# Altium PCB motor4-PCB.PcbDoc (part 1 of 2)
Units mil, origin at the board's own origin, x right, y up, seen from the top; angles counter-clockwise.
Board outline 5665.03 x 3265.03 mil, 2 copper layers (Top Layer, Bottom Layer); 182 components, 188 nets, 677 pads, 124 vias.
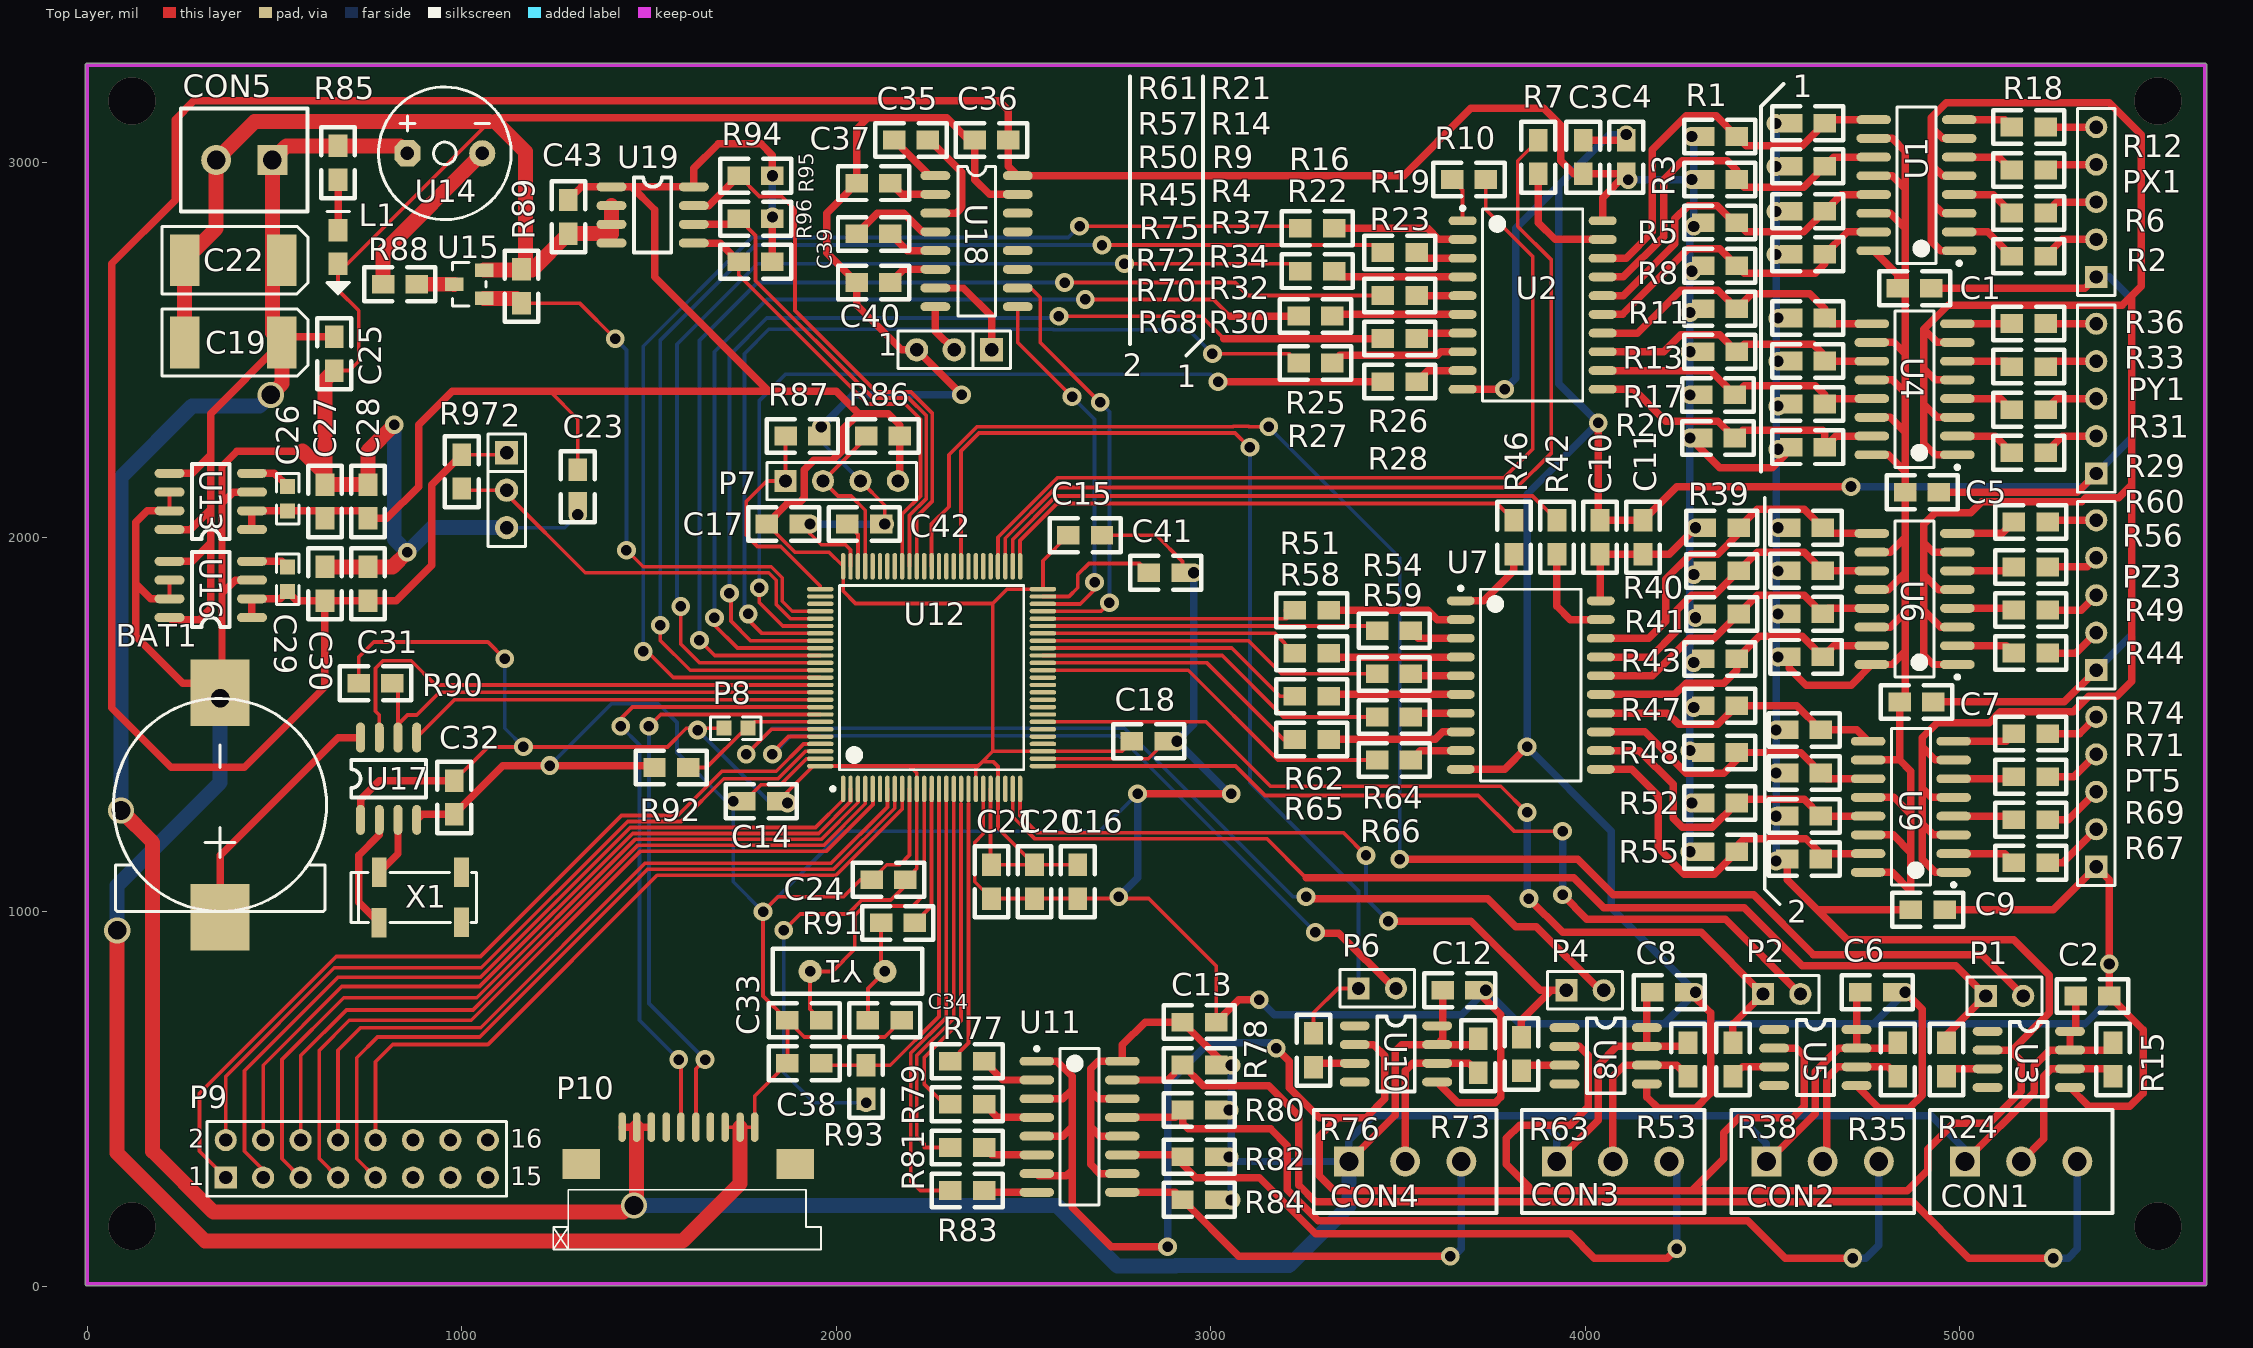
[diagram p0: Top Layer view]
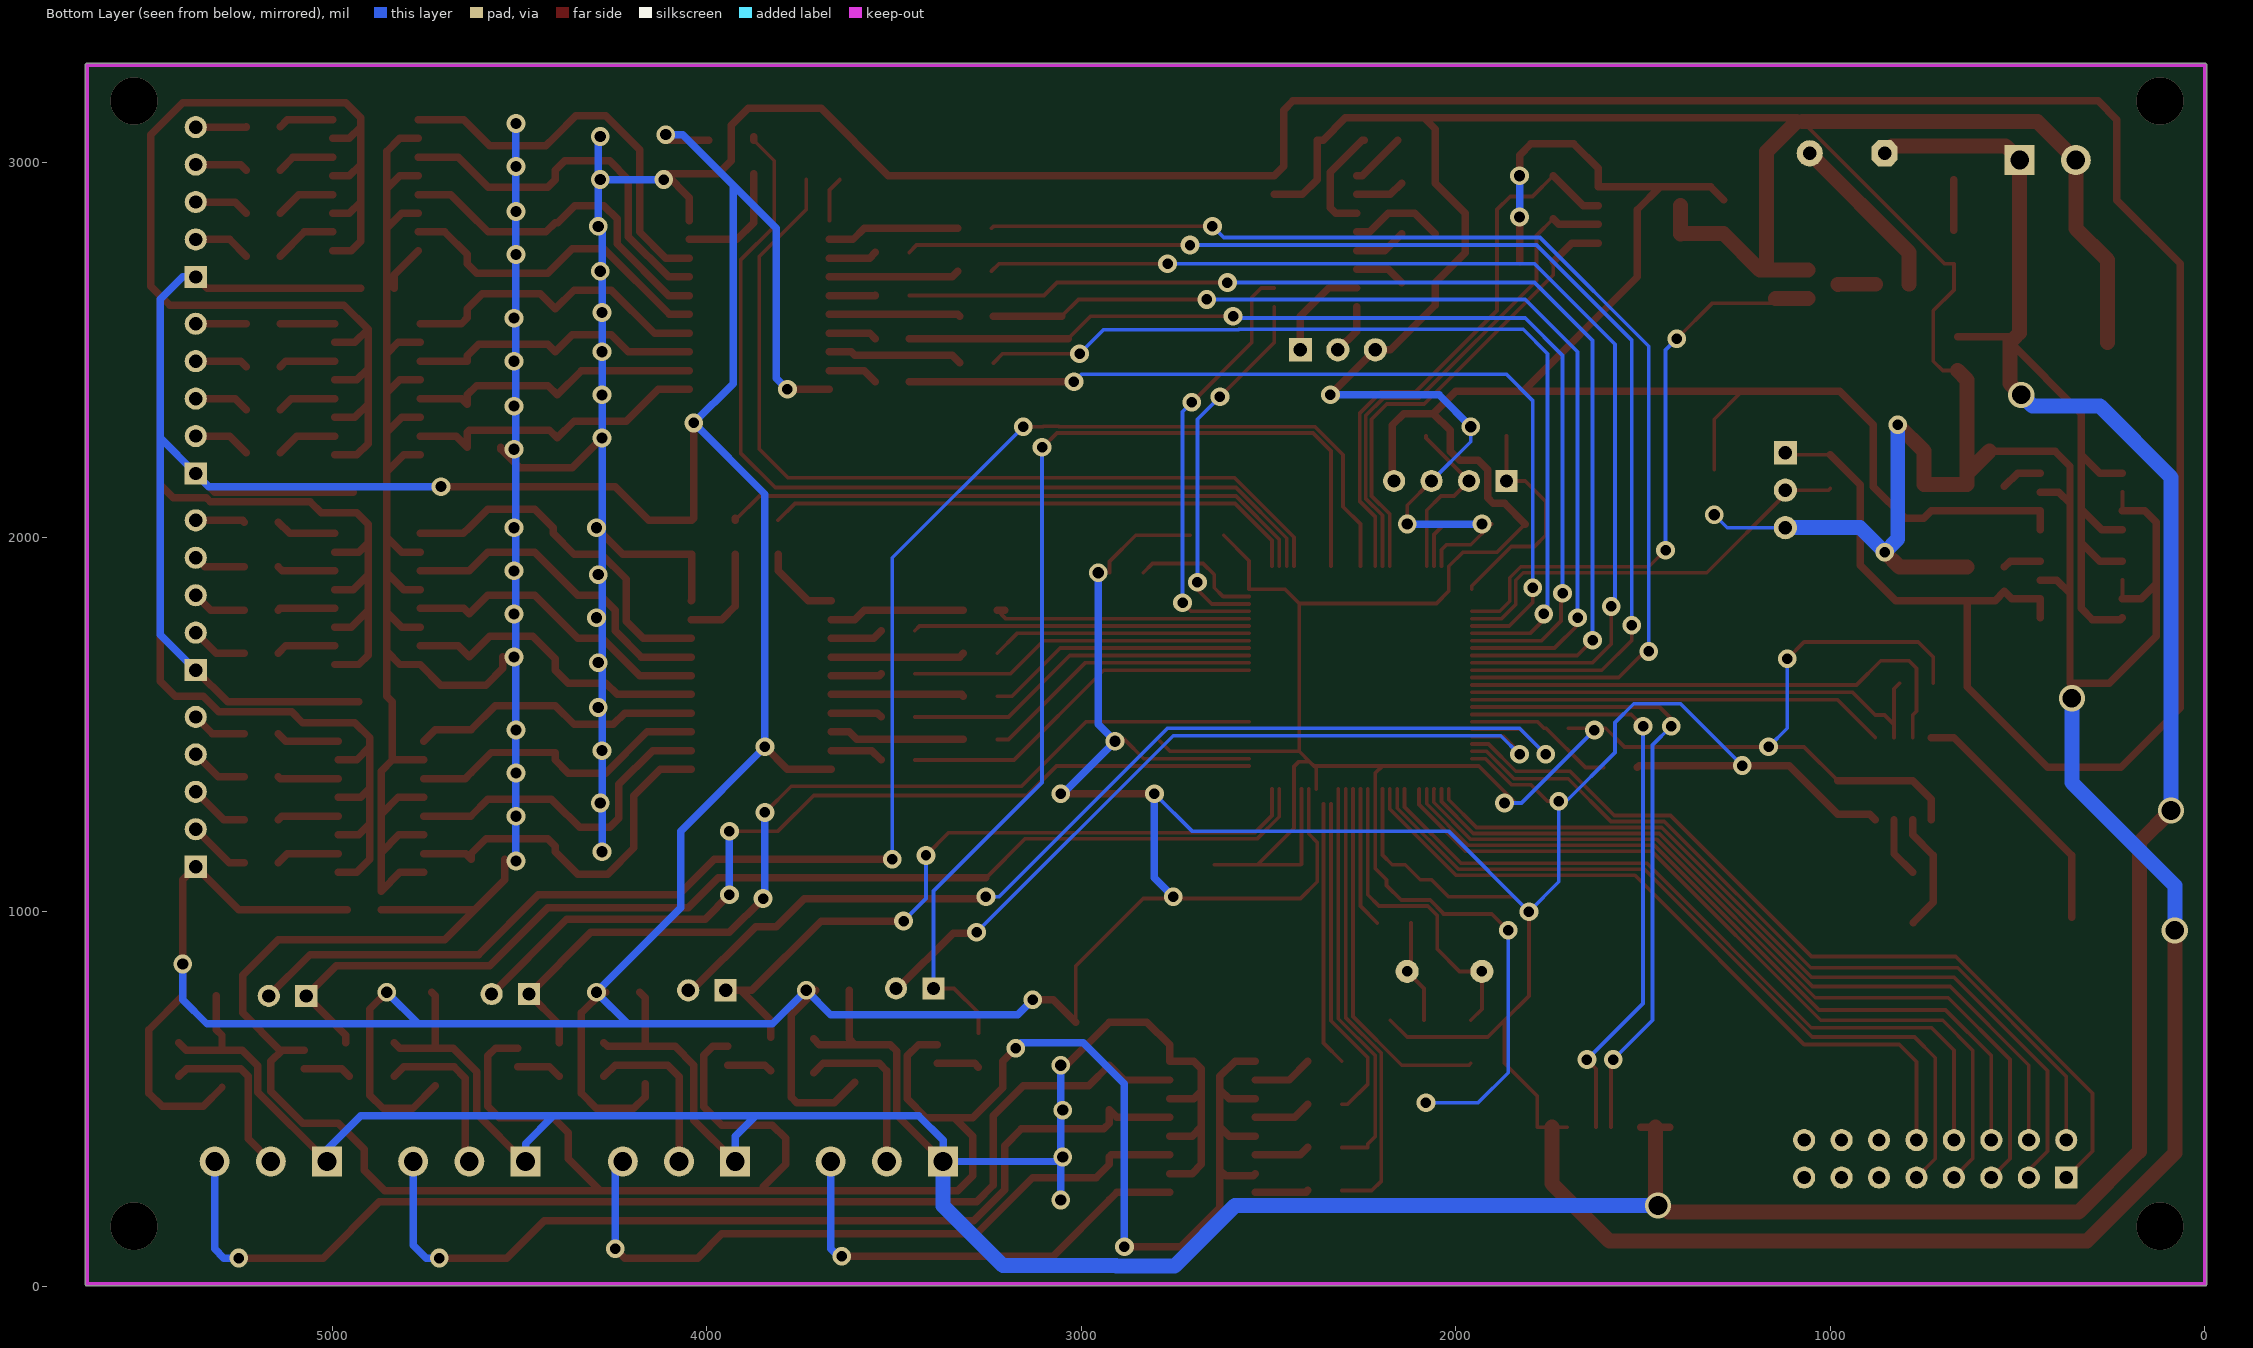
[diagram p1: Bottom Layer view, seen from below]

## Layer stack, top to bottom
Top Solder: solder mask 0.4, Solder Resist, Dk 3.5
Top Layer: signal copper 1.4
Dielectric 1: dielectric 12.6, FR-4, Dk 4.8
Bottom Layer: signal copper 1.4
Bottom Solder: solder mask 0.4, Solder Resist, Dk 3.5

## Board outline
0,0.41 cw(c0,5.43) -5.01,5.43 -5.01,3260.43 cw(c0,3260.43) 0,3265.44 5655,3265.44 cw(c5655,3260.43) 5660.02,3260.43 5660.02,5.43 cw(c5655,5.43) 5655,0.41

## Design rules (kind name [scope] priority, off if disabled: settings)
Clearance [All] p1: gap=6
PolygonConnect [All] p1: connectstyle=Relief reliefconductorwidth=10 reliefentries=4 polygonreliefangle="90 Angle" airgapwidth=10
RoutingVias [All] p1: holewidth=28 width=50 viastyle="Through Hole" minholewidth=28 minwidth=50 maxholewidth=28 maxwidth=50
SilkToSilkClearance [All] p1: silktosilkclearance=0
SilkToSolderMaskClearance [IsPad] p1: minsilkscreentomaskgap=0 clearancetoexposedcopper=TRUE
SolderMaskExpansion [All] p1: expansion=4
Width [All] p1: maxlimit=50 minlimit=10 preferedwidth=10 minimp=50.000000 maximp=50.000000 favimp=50.000000
27 further rules are at their usual default settings.

## Classes and differential pairs
component class stm32-motor4: 1 2 BAT1 C14 C15 C16 C17 C18 C19 C20 C21 C22 C23 C24 C25 C26 C27 C28 C29 C30 C31 C32 C33 C34 C35 C36 C37 C38 C39 C40 C41 C42 C43 CON5 L1 P7 P8 P9 P10 R85 R86 R87 R88 R89 R90 R91 R92 R93 R94 R95 R96 R97 U12 U13 U14 U15 U16 U17 U18 U19 X1 Y1
component class motor-drive: C1 C2 C3 C4 C5 C6 C7 C8 C9 C10 C11 C12 C13 CON1 CON2 CON3 CON4 P1 P2 P4 P6 PT5 PX1 PY1 PZ3 R1 R2 R3 R4 R5 R6 R7 R8 R9 R10 R11 R12 R13 R14 R15 R16 R17 R18 R19 R20 R21 R22 R23 R24 R25 R26 R27 R28 R29 R30 R31 R32 R33 R34 R35 R36 R37 R38 R39 R40 R41 R42 R43 R44 R45 R46 R47 R48 R49 R50 R51 R52 R53 R54 R55 R56 R57 R58 R59 R60 R61 R62 R63 R64 R65 R66 R67 R68 R69 R70 R71 R72 R73 R74 R75 R76 R77 R78 R79 R80 R81 R82 R83 R84 U1 U2 U3 U4 U5 U6 U7 U8 U9 U10 U11

## Components (designator, comment, footprint, x,y, rotation, side; value= is the part's Value field where it differs from the comment)
1 "CON3" SIP3 2415,2500.43 r180 top
2 "CON3" SIP3 1120,2225.43 r270 top
BAT1 "BAT3.6V" BAT 355,985 r90 top
C1 "0.1uF" 0805 4835,2665 r0 top
C2 "0.1uF" 0805 5400,775 r180 top
C3 "10uF" 0805 3995,2970 r90 top
C4 "0.1uF" 0805 4110,3060 r270 top
C5 "0.1uF" 0805 4855,2120 r0 top
C6 "0.1uF" 0805 4825,785 r180 top
C7 "0.1uF" 0805 4840,1560 r0 top
C8 "0.1uF" 0805 4270,785 r180 top
C9 "0.1uF" 0805 4870,1005 r0 top
C10 "10uF" 0805 4040,1955 r90 top
C11 "0.1uF" 0805 4155,2045 r270 top
C12 "0.1uF" 0805 3710,790 r180 top
C13 "0.1uF" 0805 2925,705 r0 top
C14 "0.1uF" 0805 1845,1295 r180 top
C15 "0.1uF" 0805 2710,2005 r180 top
C16 "0.1uF" 0805 2645,1035 r90 top
C17 "0.1uF" 0805 1905,2035 r180 top
C18 "0.1uF" 0805 2880,1455 r180 top
C19 "100uF" 100UF/25V_CA 520,2520 r180 top
C20 "0.1uF" 0805 2530,1035 r90 top
C21 "0.1uF" 0805 2415,1035 r90 top
C22 "100uF" 100UF/25V_CA 520,2740 r180 top
C23 "0.1uF" 0805 1310,2090 r90 top
C24 "0.1uF" 0805 2095,1085 r0 top
C25 "0.1uF" 0805 660,2535 r270 top
C26 "103" 0603 535,2070.43 r90 top
C27 "10uF" 0805 635,2050.43 r90 top
C28 "104" 0805 750,2050.43 r90 top
C29 "103" 0603 535,1855.43 r90 top
C30 "10uF" 0805 635,1830.43 r90 top
C31 "104" 0805 750,1830.43 r90 top
C32 "104" 0805 980,1260 r90 top
C33 "8pF" 0805 1960,710 r180 top
C34 "8pF" 0805 2085,710 r0 top
C35 "104" 0805 2245,3060.43 r180 top
C36 "104" 0805 2460,3060.43 r180 top
C37 "104" 0805 2055,2945.43 r0 top
C38 "100nF" 0805 1960,595 r180 top
C39 "104" 0805 2145,2810 r180 top
C40 "104" 0805 2055,2680 r0 top
C41 "2.2uF" 0805 2835,1905 r0 top
C42 "2.2uF" 0805 2030,2035 r0 top
C43 "104" 0805 1285,2900.43 r270 top
CON1 "Header 3" CON3 5150,400 r0 top
CON2 "Header 3" CON3 4620,400 r0 top
CON3 "Header 3" CON3 4060,400 r0 top
CON4 "Header 3" CON3 3505,400 r0 top
CON5 "5VIN" CON2 405,2955 r180 top
L1 "LED" 0805LED 670,2820 r270 top
P1 "Header 2" HDR1X2 5070,775 r0 top
P2 "Header 2" HDR1X2 4475,780 r0 top
P4 "Header 2" HDR1X2 3950,790 r0 top
P6 "Header 2" HDR1X2 3395,795 r0 top
P7 "JTAG" HDR1X4 1865,2150 r0 top
P8 "boot" 0603 1765,1490 r180 top
P9 "Header 8X2" HDR2X8 370,290 r0 top
P10 "ping" PCBComponent_1 1605,375 r0 top
PT5 "Header 5" HDR1X5 5365,1120 r90 top
PX1 "Header 5" HDR1X5 5365,2695 r90 top
PY1 "Header 5" HDR1X5 5365,2170 r90 top
PZ3 "Header 5" HDR1X5 5365,1645 r90 top
R1 "1K" 0805 4405,3070 r180 top
R2 "1K" 0805 5140,2750.43 r0 top
R3 "1K" 0805 4405,2955 r180 top
R4 "1K" 0805 4550,2755.43 r0 top
R5 "1K" 0805 4405,2840 r180 top
R6 "1K" 0805 5140,2865.43 r0 top
R7 "1K" 0805 3875,3060 r270 top
R8 "1K" 0805 4405,2725 r180 top
R9 "1K" 0805 4550,2870.43 r0 top
R10 "1K" 0805 3735,2955 r180 top
R11 "1K" 0805 4405,2610 r180 top
R12 "1K" 0805 5140,2980.43 r0 top
R13 "1K" 0805 4405,2495 r180 top
R14 "1K" 0805 4550,2990.43 r0 top
R15 "1K" 0805 5410,560 r90 top
R16 "1K" 0805 3240,2825 r0 top
R17 "1K" 0805 4400,2380 r180 top
R18 "1K" 0805 5140,3095.43 r0 top
R19 "1K" 0805 3460,2760.43 r0 top
R20 "1K" 0805 4400,2265 r180 top
R21 "1K" 0805 4550,3105.43 r0 top
R22 "1K" 0805 3240,2710.43 r0 top
R23 "1K" 0805 3460,2645.43 r0 top
R24 "1K" 0805 4965,650 r270 top
R25 "1K" 0805 3235,2590.43 r0 top
R26 "1K" 0805 3460,2530.43 r0 top
R27 "1K" 0805 3235,2465.43 r0 top
R28 "1K" 0805 3460,2415.43 r0 top
R29 "1K" 0805 5140,2225.43 r0 top
R30 "1K" 0805 4550,2240.43 r0 top
R31 "1K" 0805 5140,2340.43 r0 top
R32 "1K" 0805 4550,2355.43 r0 top
R33 "1K" 0805 5140,2455.43 r0 top
R34 "1K" 0805 4550,2470.43 r0 top
R35 "1K" 0805 4835,560 r90 top
R36 "1K" 0805 5140,2570.43 r0 top
R37 "1K" 0805 4550,2585.43 r0 top
R38 "1K" 0805 4395,650 r270 top
R39 "1K" 0805 4410,2025 r180 top
R40 "1K" 0805 4410,1910 r180 top
R41 "1K" 0805 4410,1795 r180 top
R42 "1K" 0805 3925,2045 r270 top
R43 "1K" 0805 4405,1675 r180 top
R44 "1K" 0805 5145,1690.43 r0 top
R45 "1K" 0805 4545,1680.43 r0 top
R46 "1K" 0805 3810,2045 r270 top
R47 "1K" 0805 4405,1550 r180 top
R48 "1K" 0805 4405,1425 r180 top
R49 "1K" 0805 5145,1805.43 r0 top
R50 "1K" 0805 4545,1795.43 r0 top
R51 "1K" 0805 3225,1805 r0 top
R52 "1K" 0805 4405,1290 r180 top
R53 "1K" 0805 4275,560 r90 top
R54 "1K" 0805 3445,1750 r0 top
R55 "1K" 0805 4405,1160 r180 top
R56 "1K" 0805 5145,1920.43 r0 top
R57 "1K" 0805 4545,1910.43 r0 top
R58 "1K" 0805 3225,1690 r0 top
R59 "1K" 0805 3445,1635 r0 top
R60 "1K" 0805 5145,2040.43 r0 top
R61 "1K" 0805 4545,2025.43 r0 top
R62 "1K" 0805 3225,1575 r0 top
R63 "1K" 0805 3830,665 r270 top
R64 "1K" 0805 3445,1520 r0 top
R65 "1K" 0805 3225,1460 r0 top
R66 "1K" 0805 3445,1405 r0 top
R67 "1K" 0805 5145,1130.43 r0 top
R68 "1K" 0805 4540,1140.43 r0 top
R69 "1K" 0805 5145,1245.43 r0 top
R70 "1K" 0805 4540,1255.43 r0 top
R71 "1K" 0805 5145,1360.43 r0 top
R72 "1K" 0805 4540,1370.43 r0 top
R73 "1K" 0805 3715,570 r90 top
R74 "1K" 0805 5145,1475.43 r0 top
R75 "1K" 0805 4540,1485.43 r0 top
R76 "1K" 0805 3275,675 r270 top
R77 "1K" 0805 2395,600.43 r180 top
R78 "1K" 0805 3015,590.43 r180 top
R79 "1K" 0805 2395,485.43 r180 top
R80 "1K" 0805 3015,470.43 r180 top
R81 "1K" 0805 2395,370.43 r180 top
R82 "1K" 0805 3015,345.43 r180 top
R83 "1K" 0805 2395,255.43 r180 top
R84 "1K" 0805 3015,230.43 r180 top
R85 "5.1K" 0805 670,2955 r90 top
R86 "4.7K" 0805 2170,2270 r180 top
R87 "4.7K" 0805 1865,2270 r0 top
R88 "100" 0805 880,2675.43 r180 top
R89 "1M" 0805 1160,2715 r270 top
R90 "5.1K" 0805 815,1610 r180 top
R91 "390" 0805 2210,970 r180 top
R92 "4.7K" 0805 1515,1385 r0 top
R93 "10K" 0805 2080,590 r270 top
R94 "5.1K" 0805 1740,2965.43 r0 top
R95 "5.1K" 0805 1740,2850.43 r0 top
R96 "5.1K" 0805 1740,2735.43 r0 top
R97 "5.1K" 0805 1000,2130 r90 top
U1 "TLP291" SOIC-TLP291-4-16N 4885,2940 r180 top
U2 "CD74HC245M" DW0020A_N 3860,2620 r0 top
U3 "6N137" SO-8 5075,680.43 r0 top
U4 "TLP291" SOIC-TLP291-4-16N 4880,2395 r180 top
U5 "6N137" SO-8 4505,685.43 r0 top
U6 "TLP291" SOIC-TLP291-4-16N 4880,1835 r180 top
U7 "CD74HC245M" DW0020A_N 3855,1605 r0 top
U8 "6N137" SO-8 3945,690 r0 top
U9 "TLP291" SOIC-TLP291-4-16N 4870,1280 r180 top
U10 "6N137" SO-8 3385,695 r0 top
U11 "TLP291" SOIC-TLP291-4-16N 2650,425.43 r0 top
U12 "STM32F405VGT6" STM-LQFP100_N 2255,1625 r90 top
U13 "LTC1763-33" SO-8 440,2020.43 r180 top
U14 "BZ" BZ_SMALL 955,3025 r270 top
U15 "SI2306" SOT-23 980,2675 r90 top
U16 "LTC1763-33" SO-8 440,1785.43 r180 top
U17 "DS1302" SO-8 730,1245 r90 top
U18 "MAX3232" SO-16 2265,2965.43 r0 top
U19 "FM24C64" SO-8 1400,2935.43 r0 top
X1 "32K" XTAL-2 780,1105 r0 top
Y1 "XTAL" XTAL1 1930,840 r0 top

## Footprints (in the part's own frame and the unit in brackets; to place one, negate y for a bottom-side part, rotate by r counter-clockwise, add the part's x,y. Pads: shape width x height; smd on the part's side, far side on the other; paste and mask are expansions set on the pad)
100UF/25V_CA [mm]
  rect 2x3.5 smd: 1(0,0) 2(6.604,0)
  silkscreen extent -1.78,-2.29 8.13,2.29
0603 [mil]
  rect 40x40 smd: 1(0,0) 2(65,0)
  silkscreen extent -35,-30 100,30
0805 [mil]
  rect 60x50 smd: 1(0,0) 2(90,0)
  silkscreen extent -50,-45 140,45
0805LED [mil]
  rect 60x50 smd: 1(0,0) 2(90,0)
  silkscreen extent -50,-30 170,30
BAT [mm]
  rect 4.5x4 smd: 1(0,0) 2(15.24,0)
  silkscreen extent 0.4,-7.22 14.84,7.22
BZ_SMALL [mil]
  oct 70x70 hole 36: 1(0,-100)
  round 70 hole 36: 2(0,100)
  silkscreen extent -177,-177 177,177
CON2 [mil]
  rect 80x80 hole 50: 1(-89.45,-52.2)
  round 80 hole 50: 2(60.55,-52.2)
  silkscreen extent -183,-190 155,86
CON3 [mil]
  rect 80x80 hole 50: 1(-135.51,-67.2)
  round 80 hole 50: 2(14.49,-67.2) 3(164.49,-67.2)
  silkscreen extent -229,-205 259,71
DW0020A_N [mm] "SOIC, 20-Leads, Body 13x7.6mm, Pitch 1.27mm, IPC Medium Density"
  oval 1.9x0.6 smd: 1(-4.75,5.715) 2(-4.75,4.445) 3(-4.75,3.175) 4(-4.75,1.905) 5(-4.75,0.635) 6(-4.75,-0.635) 7(-4.75,-1.905) 8(-4.75,-3.175) 9(-4.75,-4.445) 10(-4.75,-5.715) 11(4.75,-5.715) 12(4.75,-4.445) 13(4.75,-3.175) 14(4.75,-1.905) 15(4.75,-0.635) 16(4.75,0.635) 17(4.75,1.905) 18(4.75,3.175) 19(4.75,4.445) 20(4.75,5.715)
  silkscreen extent -4.87,-6.5 3.4,6.69, body extent -5.16,-6.4 5.16,6.4, height 2.65
HDR1X2 [mm] "Connector; Header; 2 Position"
  rect 1.5x1.5 hole 0.9: 1(0,0)
  round 1.5 hole 0.9: 2(2.54,0)
  silkscreen extent -1.27,-1.27 3.81,1.27
HDR1X4 [mm] "Connector; Header; 4 Position"
  rect 1.5x1.5 hole 0.9: 1(0,0)
  round 1.5 hole 0.9: 2(2.54,0) 3(5.08,0) 4(7.62,0)
  silkscreen extent -1.27,-1.27 8.89,1.27
HDR1X5 [mm] "Connector; Header; 5 Position"
  rect 1.5x1.5 hole 0.9: 1(0,0)
  round 1.5 hole 0.9: 2(2.54,0) 3(5.08,0) 4(7.62,0) 5(10.16,0)
  silkscreen extent -1.27,-1.27 11.43,1.27
HDR2X8 [mm] "Connector; Header; 8x2 Position"
  rect 1.5x1.5 hole 0.9: 1(0,0)
  round 1.5 hole 0.9: 2(0,2.54) 3(2.54,0) 4(2.54,2.54) 5(5.08,0) 6(5.08,2.54) 7(7.62,0) 8(7.62,2.54) 9(10.16,0) 10(10.16,2.54) 11(12.7,0) 12(12.7,2.54) 13(15.24,0) 14(15.24,2.54) 15(17.78,0) 16(17.78,2.54)
  silkscreen extent -1.27,-1.27 19.05,3.81
PCBComponent_1 [mil]
  rect 100x80 smd: 0(-285.5,-49.5) 0(285.5,-49.5)
  oval 20x79 smd: 1(-176.5,49.5) 2(-137.5,49.5) 3(-98.5,49.5) 4(-58.5,49.5) 5(-19.5,49.5) 6(20.5,49.5) 7(59.5,49.5) 8(98.5,49.5) 9(138.5,49.5) 10(177.5,49.5)
  silkscreen extent -360,-278 354,-118
SIP3 [mil]
  rect 62x62 hole 36: 1(0,0)
  round 62 hole 36: 2(100,0) 3(200,0)
  silkscreen extent -50,-50 250,50
SO-8 [mil]
  oval 80x24 smd: 1(0,0) 2(0,-50) 3(0,-100) 4(0,-150) 5(220,-150) 6(220,-100) 7(220,-50) 8(220,0)
  silkscreen extent 60,-175 160,25
SO-16 [mil]
  oval 80x24 smd: 1(0,0) 2(0,-50) 3(0,-100) 4(0,-150) 5(0,-200) 6(0,-250) 7(0,-300) 8(0,-350) 9(220,-350) 10(220,-300) 11(220,-250) 12(220,-200) 13(220,-150) 14(220,-100) 15(220,-50) 16(220,0)
  silkscreen extent 60,-375 160,25
SOIC-TLP291-4-16N [mm] "SOIC, 16-Leads, Body 10.35x4.60mm, Pitch 1.27mm, IPC Medium Density"
  oval 2.35x0.6 smd: 1(-2.9,4.445) 2(-2.9,3.175) 3(-2.9,1.905) 4(-2.9,0.635) 5(-2.9,-0.635) 6(-2.9,-1.905) 7(-2.9,-3.175) 8(-2.9,-4.445) 9(2.9,-4.445) 10(2.9,-3.175) 11(2.9,-1.905) 12(2.9,-0.635) 13(2.9,0.635) 14(2.9,1.905) 15(2.9,3.175) 16(2.9,4.445)
  silkscreen extent -3.03,-5.3 1.33,5.42, body extent -2.4,-5.3 2.4,5.3, height 2.1
SOT-23 [mil]
  rect 36x50 smd: B(-37,-80) C(0,0) E(38,-80)
  silkscreen extent -57,-85 58,5
STM-LQFP100_N [mm] "Thin QFP, 100-Leads, Body 14x14mm, Pitch 0.5mm, IPC Medium Density"
  oval 1.8x0.3 smd: 1(-7.55,6) 2(-7.55,5.5) 3(-7.55,5) 4(-7.55,4.5) 5(-7.55,4) 6(-7.55,3.5) 7(-7.55,3) 8(-7.55,2.5) 9(-7.55,2) 10(-7.55,1.5) 11(-7.55,1) 12(-7.55,0.5) 13(-7.55,0) 14(-7.55,-0.5) 15(-7.55,-1) 16(-7.55,-1.5) 17(-7.55,-2) 18(-7.55,-2.5) 19(-7.55,-3) 20(-7.55,-3.5) 21(-7.55,-4) 22(-7.55,-4.5) 23(-7.55,-5) 24(-7.55,-5.5) 25(-7.55,-6) 51(7.55,-6) 52(7.55,-5.5) 53(7.55,-5) 54(7.55,-4.5) 55(7.55,-4) 56(7.55,-3.5) 57(7.55,-3) 58(7.55,-2.5) 59(7.55,-2) 60(7.55,-1.5) 61(7.55,-1) 62(7.55,-0.5) 63(7.55,0) 64(7.55,0.5) 65(7.55,1) 66(7.55,1.5) 67(7.55,2) 68(7.55,2.5) 69(7.55,3) 70(7.55,3.5) 71(7.55,4) 72(7.55,4.5) 73(7.55,5) 74(7.55,5.5) 75(7.55,6)
  oval 0.3x1.8 smd: 26(-6,-7.55) 27(-5.5,-7.55) 28(-5,-7.55) 29(-4.5,-7.55) 30(-4,-7.55) 31(-3.5,-7.55) 32(-3,-7.55) 33(-2.5,-7.55) 34(-2,-7.55) 35(-1.5,-7.55) 36(-1,-7.55) 37(-0.5,-7.55) 38(0,-7.55) 39(0.5,-7.55) 40(1,-7.55) 41(1.5,-7.55) 42(2,-7.55) 43(2.5,-7.55) 44(3,-7.55) 45(3.5,-7.55) 46(4,-7.55) 47(4.5,-7.55) 48(5,-7.55) 49(5.5,-7.55) 50(6,-7.55) 76(6,7.55) 77(5.5,7.55) 78(5,7.55) 79(4.5,7.55) 80(4,7.55) 81(3.5,7.55) 82(3,7.55) 83(2.5,7.55) 84(2,7.55) 85(1.5,7.55) 86(1,7.55) 87(0.5,7.55) 88(0,7.55) 89(-0.5,7.55) 90(-1,7.55) 91(-1.5,7.55) 92(-2,7.55) 93(-2.5,7.55) 94(-3,7.55) 95(-3.5,7.55) 96(-4,7.55) 97(-4.5,7.55) 98(-5,7.55) 99(-5.5,7.55) 100(-6,7.55)
  silkscreen extent -7.67,-6.25 6.25,6.82, body extent -7,-7 7,7, height 1.6
XTAL1 [mil]
  round 62 hole 28: 1(0.37,0.28) 2(200.37,0.28)
  silkscreen extent -100,-60 300,60
XTAL-2 [mm]
  rect 1x2 smd: 1(0,0) 2(-0.025,-3.404) ""(5.579,-3.378) ""(5.579,0)
  silkscreen extent -1.93,-3.4 6.59,0

## Part data
1 2: "Connector"
C1 C2 C3 C4 C5 C6 C7 C8 C9 C10 C11 C12 C13: library part CAP, "Capacitor"
C14 C15 C16 C17 C18 C20 C21 C23 C24 C25 C26 C27 C28 C29 C30 C31 C32 C33 C34 C35 C36 C37 C38 C39 C40 C41 C42 C43: library part C
C19 C22: library part ELECTRO1
CON1 CON2 CON3 CON4: "Header, 3-Pin"
CON5 P8: library part "Header 2", "Header, 2-Pin"
P1 P2 P4 P6: "Header, 2-Pin"
P7: library part "Header 4", "Header, 4-Pin"
P9: "Header, 8-Pin, Dual row"
P10: library part "Header 10", "Header, 10-Pin"
PT5 PX1 PY1 PZ3: "Header, 5-Pin"
R1 R2 R3 R4 R5 R6 R7 R8 R9 R10 R11 R12 R13 R14 R15 R16 R17 R18 R19 R20 R21 R22 R23 R24 R25 R26 R27 R28 R29 R30 R31 R32 R33 R34 R35 R36 R37 R38 R39 R40 R41 R42 R43 R44 R45 R46 R47 R48 R49 R50 R51 R52 R53 R54 R55 R56 R57 R58 R59 R60 R61 R62 R63 R64 R65 R66 R67 R68 R69 R70 R71 R72 R73 R74 R75 R76 R77 R78 R79 R80 R81 R82 R83 R84: library part RES2
R85 R86 R87 R88 R89 R90 R91 R92 R93 R94 R95 R96 R97: library part RES
U1 U4 U6 U9 U11: library part TLP291-4, "光耦隔离"
U2 U7: "High Speed CMOS Logic Non-Inverting Octal-Bus Transceivers with 3-State Outputs, DW0020A, TUBE"
U3 U5 U8 U10: library part HCPL2400
U12: "ARM Cortex-M4 32-bit MCU+FPU, 210 DMIPS, 1024 kB Flash, 192 kB Internal RAM, 82 I/Os, 100-pin LQFP, -40 to 85 degC, Tray"
U13 U16: library part LT1763
U15: library part MOFET_N
X1: library part XTAL
Y1: "Crystal Oscillator"

## Via types
v1: diameter 50, hole 28, Top Layer to Bottom Layer, 64 vias
v2: diameter 50, hole 30, Top Layer to Bottom Layer, 51 vias
v3: diameter 70, hole 50, Top Layer to Bottom Layer, 5 vias
v4: diameter 126, hole 126, Top Layer to Bottom Layer, 4 vias

## Nets (pads, with @x,y where several pads share a name; then routed paths per layer and width w, separated by ;. In a path a pad name is that pad's centre, name@x,y a point inside that pad or via, vN(x,y) a via of type N, cw(c..) or ccw(c..) an arc to the next point about the centre after c; other vN are vias at no path point)
18B20: 2.2 R97.1 U12.80 | length 1145.9
  Top Layer w10: R97.1@1000,2130 1004.57,2125.43 2.2@1120,2125.43 1120,2115 1330,1905 1820,1905 1840,1885 1840,1820 1877.52,1782.48 U12.80@1957.76,1782.48
+3.3V_D: C14.1 C15.2 C16.2 C17.2 C18.2 C20.2 C21.2 C23.2 C24.2 C26.1 C27.1 C28.1 C32.2 C43.1 P7.4 P8.2 R86.1 R90.2 R93.2 R94.2 R95.2 R96.2 U12.11 U12.19 U12.21 U12.22 U12.28 U12.50 U12.75 U12.100 U13.1 U13.2 U17.1 U19.1 U19.8 | length 11353.4
  Top Layer w10: R90.2@725,1610 725,1680 765,1720 1070,1720 v1(1115,1675) ; C32.2@980,1350 1070,1440 v1(1165,1440) 1550,1440 1600,1490 P8.2@1700,1490 ; 1235,2390 1310,2315 C23.2@1310,2180 ; C17.2@1815,2035 1890,1960 1981.02,1960 U12.75@2018.78,1922.24 2018.78,1856.22 2051.85,1823.15 2418.15,1823.15 ; C14.1@1845,1295 1938.78,1388.78 U12.100@1957.76,1388.78 2196.22,1388.78 ; v1(1860,950) 1904,994 2034,994 2034,996.63 2068.37,1031 2146,1031 2185,1070 C24.2@2185,1085 2215.63,1115.63 U12.11@2215.63,1327.76 2215.63,1369.37 2196.22,1388.78 ; U12.19@2373.11,1327.76 2373.11,1383.11 2378.78,1388.78 ; U12.21@2412.48,1327.76 2412.48,1127.52 C21.2@2415,1125 C20.2@2530,1125 ; C15.2@2620,2005 2552.24,1937.24 U12.50@2552.24,1861.22 2456.22,1861.22 2418.15,1823.15 ; C16.2@2645,1125 C20.2@2530,1125 ; C18.2@2790,1455 2763.15,1428.15 U12.28@2552.24,1428.15 2418.15,1428.15 ; 2196.22,1388.78 2378.78,1388.78 ; 2378.78,1388.78 2390,1400 ; 2390,1400 2420,1400 2432.17,1387.83 U12.22@2432.17,1327.76 2432.17,1222.83 C20.2@2530,1125 ; 2390,1400 2418.15,1428.15 ; 2418.15,1428.15 2418.15,1823.15
  Top Layer w20: U13.1@440,2020.43 U13.2@440,2070.43 730,2070.43 C28.1@750,2050.43 800.43,2050.43 885,2135 885,2300 975,2390 1235,2390 1820,2390 ; U17.1@730,1245 730,1300 780,1350 C32.2@980,1350 ; C43.1@1285,2900.43 1320,2935.43 U19.1@1400,2935.43 1454.57,2935.43 ; C17.2@1815,2035 1870,2090 1900,2090 1915,2105 1915,2180 1940,2205 1990,2205 2015,2230 2015,2285 2060,2330 ; R96.2@1830,2735.43 R95.2@1830,2850.43 ; R94.2@1830,2965.43 1830,3020 1800,3050 1685,3050 1620,2985 U19.8@1620,2935.43 1454.57,2935.43 ; P7.4@2165,2150 2170,2155 R86.1@2170,2270 2170,2299.5 2139.5,2330 2060,2330 ; 1454.57,2935.43 1515,2875 1515,2695 1820,2390 ; 1820,2390 2000,2390 2060,2330
  Bottom Layer w10: v1(1115,1675) 1115,1490 v1(1165,1440) ; v1(1630,1485) 1825,1290 v2(1870,1290) ; v1(1860,950) 1860,570 1940,490 v1(2080,490)
  Bottom Layer w20: v2(1830,2855) v2(1830,2965)
+3.3V_DO: 2.1 C1.1 C3.1 C4.2 C5.1 C7.1 C9.1 C10.1 C11.2 C29.1 C30.1 C31.1 C36.1 R1.2 R3.2 R4.1 R5.2 R8.2 R9.1 R11.2 R13.2 R14.1 R17.2 R20.2 R21.1 R30.1 R32.1 R34.1 R37.1 R39.2 R40.2 R41.2 R43.2 R45.1 R47.2 R48.2 R50.1 R52.2 R55.2 R57.1 R61.1 R68.1 R70.1 R72.1 R75.1 R97.2 U1.10 U1.12 U1.14 U1.16 U2.20 U3.2 U4.10 U4.12 U4.14 U4.16 U5.2 U6.10 U6.12 U6.14 U6.16 U7.20 U8.2 U9.10 U9.12 U9.14 U9.16 U10.2 U11.1 U11.3 U11.5 U11.7 U16.1 U16.2 U18.16 | length 24430.3
  Top Layer w10: R97.2@1000,2220 1114.57,2220 2.1@1120,2225.43
  Top Layer w20: U16.1@440,1785.43 U16.2@440,1835.43 515,1835.43 C29.1@535,1855.43 560,1830.43 C30.1@635,1830.43 ; R97.2@1000,2220 920,2140 920,1925 825.43,1830.43 C31.1@750,1830.43 C30.1@635,1830.43 ; U11.7@2535.83,300.43 2541.26,295 2615,295 2630,310 ; U11.5@2535.83,400.43 2605.43,400.43 2630,425 ; U11.3@2535.83,500.43 2605.43,500.43 2630,525 ; U11.1@2535.83,600.43 2589.57,600.43 2630,560 2630,525 ; v1(2885,105) 2735,105 2630,210 2630,310 ; v1(3175,635) 3210,600 3210,530 3290,450 3340,450 ; U10.2@3385,645 3435,645 3465,615 3465,500 3415,450 3340,450 ; 3850,265 3790,325 3790,395 3825,430 3960,430 4009,479 4009,616 3985,640 U8.2@3945,640 ; U7.20@4042.01,1830 4040,1832.01 C10.1@4040,1955 C11.2@4155,1955 4225,1955 v2(4295,2025) ; U2.20@4047.01,2845 4047.01,2907.01 C4.2@4110,2970 C3.1@3995,2970 3970,2970 3935,3005 3935,3100 3890,3145 3695,3145 3515.43,2965.43 U18.16@2485,2965.43 2460,2990.43 C36.1@2460,3060.43 2460,3140 2435,3165 285,3165 235,3115 235,2900 65,2730 65,1545 225,1385 420,1385 635,1600 C30.1@635,1830.43 ; v2(4280,2265) 4360,2185 4500,2185 4550,2235 R30.1@4550,2240.43 ; U5.2@4505,635.43 4564.57,635.43 4585,615 4585,480 4555,450 4410,450 4370,410 4370,340 4285,255 ; R68.1@4540,1140.43 4540,1085 4620,1005 ; R45.1@4545,1680.43 4545,1650 4590,1605 4710.83,1605 U6.16@4765.83,1660 4820,1660 4855,1695 ; U9.16@4755.83,1105 4820,1105 4870,1055 4870,1157.5 ; U9.14@4755.83,1205 4822.5,1205 4870,1157.5 ; U9.12@4755.83,1305 4825,1305 4870,1260 ; U9.10@4755.83,1405 4840,1405 ; U6.14@4765.83,1760 4815,1760 4855,1800 ; U6.12@4765.83,1860 4810,1860 4855,1905 ; U6.10@4765.83,1960 4815,1960 4855,2000 ; U4.16@4765.83,2220 4810,2220 4855,2175 ; U4.14@4765.83,2320 4815,2320 4855,2280 ; U4.12@4765.83,2420 4820,2420 4855,2385 ; U4.10@4765.83,2520 4825,2520 4855,2490 ; U1.16@4770.83,2765 4835,2700.83 C1.1@4835,2665 C1.1@4855,2685 ; U1.14@4770.83,2865 4815,2865 4855,2825 ; U1.12@4770.83,2965 4820,2965 4855,2930 ; U1.10@4770.83,3065 4820,3065 4855,3030 4855,2930 ; C9.1@4870,1005 4620,1005 ; U3.2@5075,630.43 5134.57,630.43 ; 2630,310 2630,425 ; 2630,425 2630,525 ; 3340,450 3290,400 3290,295 3330,255 4285,255 ; 4285,255 4860,255 4915,310 4915,365 4985,435 5079.92,435 5165,520.08 5165,600 5134.57,630.43 ; 4620,1005 4700,925 5145,925 5240,830 5240,730 5140.43,630.43 5134.57,630.43 ; 4840,1405 C7.1@4840,1560 4855,1575 4855,1695 ; 4840,1405 4870,1375 4870,1260 ; 4855,1695 4855,1800 ; 4855,1800 4855,1905 ; 4855,1905 4855,2000 ; 4855,2000 C5.1@4855,2120 4855,2175 ; 4855,2175 4855,2280 ; 4855,2280 4855,2385 ; 4855,2385 4855,2490 ; 4855,2490 C1.1@4855,2685 ; C1.1@4855,2685 4855,2825 ; 4855,2825 4855,2930 ; 4870,1157.5 4870,1260
  Bottom Layer w20: v1(2885,105) 2885,540 2995,650 3160,650 v1(3175,635) ; v1(4115,2955) v2(4285,2955) ; v2(4280,1160) v2(4280,1430) v2(4280,2265) v2(4280,2380) v2(4280,2495) v2(4280,2600) 4280,2820 v2(4290,2830) 4290,3065 v2(4285,3070) ; v2(4510,1135) v2(4510,1255) v2(4510,1370) v2(4510,1485) 4510,1675 v2(4515,1680) 4510,1685 v2(4510,2755) v2(4510,2870) v2(4510,2990) v2(4510,3105)
  other v2: 4285,1290 4290,1545 4290,1665 4295,1785 4515,1795 4290,1900 4515,1910 4515,2025 4515,2235 4515,2350 4515,2470 4515,2585 4285,2710
+5V_A: U1.1 U1.3 U1.5 U1.7 U4.1 U4.3 U4.5 U4.7 U6.1 U6.3 U6.5 U6.7 U9.1 U9.3 U9.5 U9.7 | length 6761
  Top Layer w20: U9.1@4984.17,1105 4935,1105 4900,1140 4900,1235 ; U9.3@4984.17,1205 4930,1205 4900,1235 ; U9.5@4984.17,1305 4925,1305 4900,1330 ; U9.7@4984.17,1405 4935,1405 4900,1440 ; U6.1@4994.17,1660 4930,1660 4905,1685 4905,1805 ; U6.3@4994.17,1760 4950,1760 4905,1805 ; U6.5@4994.17,1860 4945,1860 4905,1900 ; U6.7@4994.17,1960 4930,1960 4905,1985 ; U4.1@4994.17,2220 4935,2220 4905,2250 4905,2355 ; U4.3@4994.17,2320 4940,2320 4905,2355 ; U4.5@4994.17,2420 4935,2420 4905,2450 ; U4.7@4994.17,2520 4940,2520 4905,2555 ; U1.1@4999.17,2765 4950,2765 4925,2790 4925,2895 ; U1.3@4999.17,2865 4955,2865 4925,2895 ; U1.5@4999.17,2965 4955,2965 4925,2995 ; U1.7@4999.17,3065 4955,3065 4925,3095 ; 4900,1235 4900,1330 ; 4900,1330 4900,1440 ; 4900,1440 4900,1465 4940,1505 5080,1505 5109,1534 5304,1534 5345,1575 5420,1575 5460,1615 5460,2140 ; 4905,1805 4905,1900 ; 4905,1900 4905,1985 ; 4905,1985 4905,2035 4935,2065 5030,2065 5059,2094 5325.77,2094 5336.77,2105 5425,2105 5460,2140 ; 4905,2355 4905,2450 ; 4905,2450 4905,2555 ; 4905,2555 4970,2620 5435,2620 5460,2645 ; 4925,2895 4925,2995 ; 4925,2995 4925,3095 ; 4925,3095 4925,3120 4965,3160 5400,3160 5485,3075 5485,2670 5460,2645 ; 5460,2140 5460,2645
+5V_IN: C2.2 C6.2 C8.2 C12.2 C13.1 C19.1 C22.1 C25.1 CON1.1 CON2.1 CON3.1 CON4.1 CON5.1 P10.1 P10.2 P10.3 R15.2 R35.2 R53.2 R73.2 R78.1 R80.1 R82.1 R84.1 R85.2 U3.7 U3.8 U5.7 U5.8 U8.7 U8.8 U10.7 U10.8 U11.10 U11.12 U11.14 U11.16 U13.5 U13.8 U14.1 U16.5 U16.8 | length 15325.5
  Top Layer w20: U16.8@220,1785.43 225.43,1780 300,1780 330,1810 330,1985 ; U16.5@220,1935.43 280.43,1935.43 330,1985 ; U13.8@220,2020.43 275.43,2020.43 330,2075 ; U13.5@220,2170.43 280.43,2170.43 330,2220 ; C19.1@494.45,2545.55 505,2535 C25.1@660,2535 ; C19.1@520,2520 330,2330 330,2220 ; P10.1@1428.5,424.5 P10.2@1467.5,424.5 P10.3@1506.5,424.5 ; U11.10@2764.17,300.43 2704.57,300.43 2680,325 2680,425 ; U11.12@2764.17,400.43 2704.57,400.43 2680,425 ; U11.14@2764.17,500.43 2699.57,500.43 2680,520 ; v2(3055,590) 3040,590 C13.1@2925,705 2825,705 2764.17,644.17 U11.16@2764.17,600.43 2700.43,600.43 2680,580 2680,520 ; CON4.1@3369.49,332.8 3492.5,455.81 3492.5,627.5 3510,645 U10.7@3605,645 ; C12.2@3620,790 3620,660 U10.7@3605,645 ; R73.2@3715,660 3700,645 U10.7@3605,645 ; CON3.1@3924.49,332.8 4035,443.31 4035,590 4085,640 U8.7@4165,640 ; C8.2@4180,785 4165,770 U8.8@4165,690 U8.7@4165,640 ; R53.2@4275,650 4265,640 U8.7@4165,640 ; CON2.1@4484.49,332.8 4487.8,332.8 4615,460 4615,572.43 4678,635.43 U5.7@4725,635.43 ; C6.2@4735,785 4725,775 U5.8@4725,685.43 U5.7@4725,635.43 ; R35.2@4835,650 4820.43,635.43 U5.7@4725,635.43 ; CON1.1@5014.49,332.8 5199,517.31 5199,589 5240.43,630.43 U3.7@5295,630.43 ; C2.2@5310,775 5310,685 5295,670 U3.7@5295,630.43 ; R15.2@5410,650 5390.43,630.43 U3.7@5295,630.43 ; 330,1985 330,2075 ; 330,2075 330,2220 ; 2680,425 2680,520
  Top Layer w40: v3@85,1275 v3(90,1270) 175,1185 175,360 337.5,197.5 1432.5,197.5 1467.5,232.5 P10.2@1467.5,424.5 ; v3(490,2380) 520,2410 C19.1@520,2520 C19.1@505,2535 ; C19.1@494.45,2545.55 CON5.1@494.45,3007.2 532.24,3045 R85.2@670,3045 835,3045 U14.1@855,3025
  Bottom Layer w20: v2(3050,345) v2@3055,340 ; v2(3055,230) v2@3055,340 ; v2(3055,590) v2@3055,340 ; CON3.1@3924.49,332.8 3924.49,400.51 3870,455 ; CON2.1@4484.49,332.8 4484.49,380.51 4410,455 ; CON1.1@5014.49,332.8 5014.49,365.51 4925,455 4410,455 ; v2@3055,340 3062.2,332.8 CON4.1@3369.49,332.8 3369.49,389.49 3435,455 3870,455 ; 3870,455 4410,455
  Bottom Layer w40: v3(90,1270) 90,2160 280,2350 460,2350 v3(490,2380) ; v3(1460,215) 2590,215 2751,54 2906.12,54 2907.12,55 3210,55 3369.49,214.49 CON4.1@3369.49,332.8
  other v2: 3050,470
BREAK_DIR1: R46.1 U12.51 | length 1447.3
  Top Layer w10: U12.51@2491.22,1922.24 2491.22,1991.22 2590,2090 3765,2090 R46.1@3810,2045
BREAK_DIR2: R10.1 U12.54 | length 2374.7
  Top Layer w10: U12.54@2432.17,1922.24 2432.17,2000.05 2590.93,2158.81 3783.81,2158.81 3860,2235 3860,2750 3735,2875 R10.1@3735,2955
BREAK_IN1: R16.1 U12.88 | length 3210.5
  Top Layer w10: v1(1485,1695) 1490,1700 1565,1625 U12.88@1957.76,1625 ; v1(2650,2830) 3235,2830 R16.1@3240,2825
  Bottom Layer w10: v1(1485,1695) 1485,2510 1775,2800 2620,2800 v1(2650,2830)
BREAK_IN2: R19.1 U12.87 | length 3304.8
  Top Layer w10: v1(1530,1765) 1530,1725 1610.31,1644.68 U12.87@1957.76,1644.68 ; v1(2710,2780) 3440.43,2780 R19.1@3460,2760.43
  Bottom Layer w10: v1(1530,1765) 1530,2525 1785,2780 v1(2710,2780)
BREAK_IN3: R22.1 U12.86 | length 2960
  Top Layer w10: v1@1575,1810 1585,1800 1585,1715 1635.63,1664.37 U12.86@1957.76,1664.37 ; v1(2770,2730) 3220.43,2730 R22.1@3240,2710.43
  Bottom Layer w10: v1@1575,1810 1575,2515 1790,2730 v1(2770,2730)
  other v1: 1585,1815
BREAK_IN4: R23.1 U12.85 | length 3043.2
  Top Layer w10: v1(1635,1725) 1675.94,1684.06 U12.85@1957.76,1684.06 ; v1(2610,2680) 3065.43,2680 3100,2645.43 R23.1@3460,2645.43
  Bottom Layer w10: v1(1635,1725) 1635,2525 1790,2680 v1(2610,2680)
BREAK_IN5: R25.1 U12.84 | length 2674.6
  Top Layer w10: v1@1675,1765 1736.26,1703.74 U12.84@1957.76,1703.74 ; v1(2665,2635) 3008.14,2635 3052.71,2590.43
  Top Layer w20: 3052.71,2590.43 R25.1@3235,2590.43
  Bottom Layer w10: v1@1675,1765 1675,2495 1815,2635 v1(2665,2635)
  other v1: 1675,1785
BREAK_IN6: R26.1 U12.83 | length 2784.4
  Top Layer w10: v1(1715,1850) 1719,1846 1719,1776 1771.57,1723.43 U12.83@1957.76,1723.43 ; v1(2595,2590) 2975.56,2590 3035.13,2530.43
  Top Layer w20: 3035.13,2530.43 R26.1@3460,2530.43
  Bottom Layer w10: v1(1715,1850) 1715,2485 1815,2585 2590,2585 v1(2595,2590)
BREAK_IN7: R27.1 U12.82 | length 2473.3
  Top Layer w10: v1@1755,1795 1750,1795 1801.89,1743.11 U12.82@1957.76,1743.11 ; v1(3005,2490) 3210.43,2490 R27.1@3235,2465.43
  Bottom Layer w10: v1@1755,1795 1755,2490 1820,2555 2579.09,2555 2580.09,2554 2941,2554 v1(3005,2490)
  other v1: 1765,1795
BREAK_IN8: R28.1 U12.81 | length 2430.4
  Top Layer w10: v1(1795,1865) 1795,1825 1857.2,1762.8 U12.81@1957.76,1762.8
  Top Layer w20: v1@3020.43,2415.43 R28.1@3460,2415.43
  Bottom Layer w10: v1(1795,1865) 1795,2365 1865,2435 3000,2435 v1(3020,2415)
BREAK_IN9: R51.1 U12.46 | length 702.1
  Top Layer w10: U12.46@2552.24,1782.48 3202.48,1782.48 R51.1@3225,1805
  Top Layer w20: R51.1@3205,1805 R51.1@3225,1805
BREAK_IN10: R54.1 U12.45 | length 898.1
  Top Layer w10: U12.45@2552.24,1762.8 3432.2,1762.8 R54.1@3445,1750
BREAK_IN11: R58.1 U12.44 | length 694.8
  Top Layer w10: U12.44@2552.24,1743.11 3171.89,1743.11 R58.1@3225,1690
BREAK_IN12: R59.1 U12.43 | length 929.4
  Top Layer w10: U12.43@2552.24,1723.43 3101.57,1723.43 3190,1635 R59.1@3445,1635
BREAK_IN13: R62.1 U12.42 | length 726.1
  Top Layer w10: U12.42@2552.24,1703.74 3056.26,1703.74 3185,1575 R62.1@3225,1575
BREAK_IN14: R64.1 U12.41 | length 960.7
  Top Layer w10: U12.41@2552.24,1684.06 3030.94,1684.06 3195,1520 R64.1@3445,1520
BREAK_IN15: R65.1 U12.40 | length 757.4
  Top Layer w10: U12.40@2552.24,1664.37 2990.63,1664.37 3195,1460 R65.1@3225,1460
BREAK_IN16: R66.1 U12.39 | length 992
  Top Layer w10: U12.39@2552.24,1644.68 2940.31,1644.68 3180,1405 R66.1@3445,1405
BREAK_OE1: R42.1 U12.52 | length 1605.3
  Top Layer w10: U12.52@2471.54,1922.24 2471.54,1994.16 2587.37,2110 3860,2110 R42.1@3925,2045
  Top Layer w20: R42.1@3925,2045 R42.1@3925,2050
BREAK_OE2: R7.1 U12.53 | length 2532.5
  Top Layer w10: U12.53@2451.85,1922.24 2451.85,1997.11 2587.37,2132.63 3817.63,2132.63 3910,2225 3910,2740 3820,2830 3820,3005 R7.1@3875,3060
  Top Layer w20: R7.1@3875,3060 R7.1@3875,3070
BREAK_OUT1: R1.1 R21.2 U1.9 U2.18 | length 1072.2
  Top Layer w20: U2.18@4047.01,2745 4110,2745 4180,2815 4180,3035 4270,3125 4350,3125 R1.1@4405,3070 4430,3045 4579.57,3045 R21.2@4640,3105.43 4649.57,3115 U1.9@4770.83,3115
BREAK_OUT2: R3.1 R14.2 U1.11 U2.17 | length 1018.3
  Top Layer w20: U2.17@4047.01,2695 4102.43,2695 4210,2802.57 4210,2955 4260,3005 4380,3005 4405,2980 R3.1@4405,2955 4425,2935 4584.57,2935 R14.2@4640,2990.43 4664.57,3015 U1.11@4770.83,3015